# Altium PCB digital_power_board.PcbDoc
Units mil, origin at the board's own origin, x right, y up, seen from the top; angles counter-clockwise.
Board outline 5050 x 5050 mil, 6 copper layers (Top Layer, AGND, 3V3P, P5V, VBATT, Bottom Layer), stack 32.112 mil thick; 28 components, 23 nets, 139 pads, 108 vias.
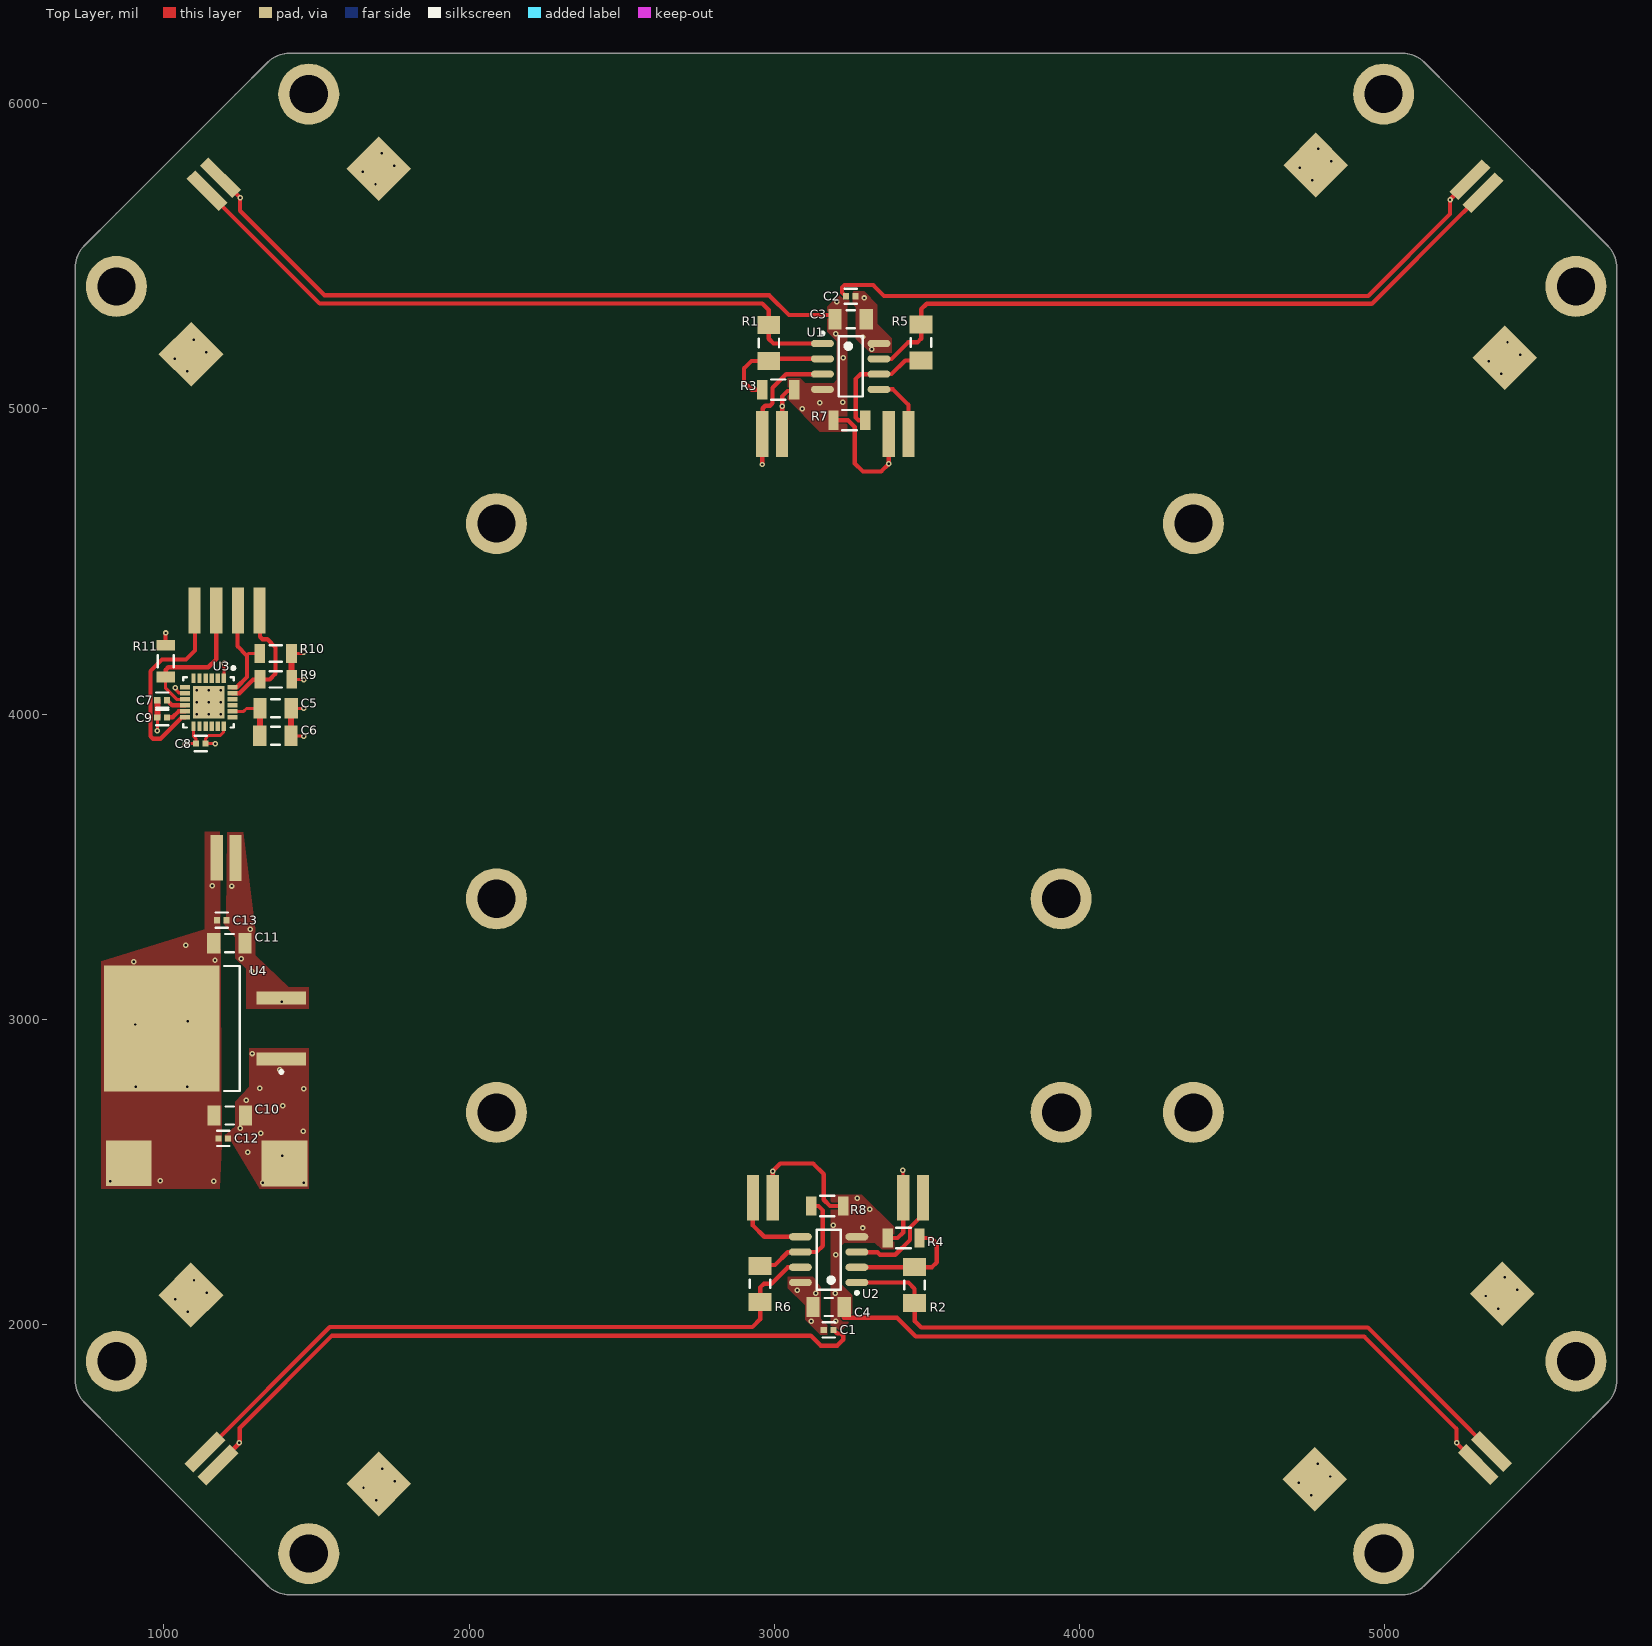
[diagram p0: Top Layer view]
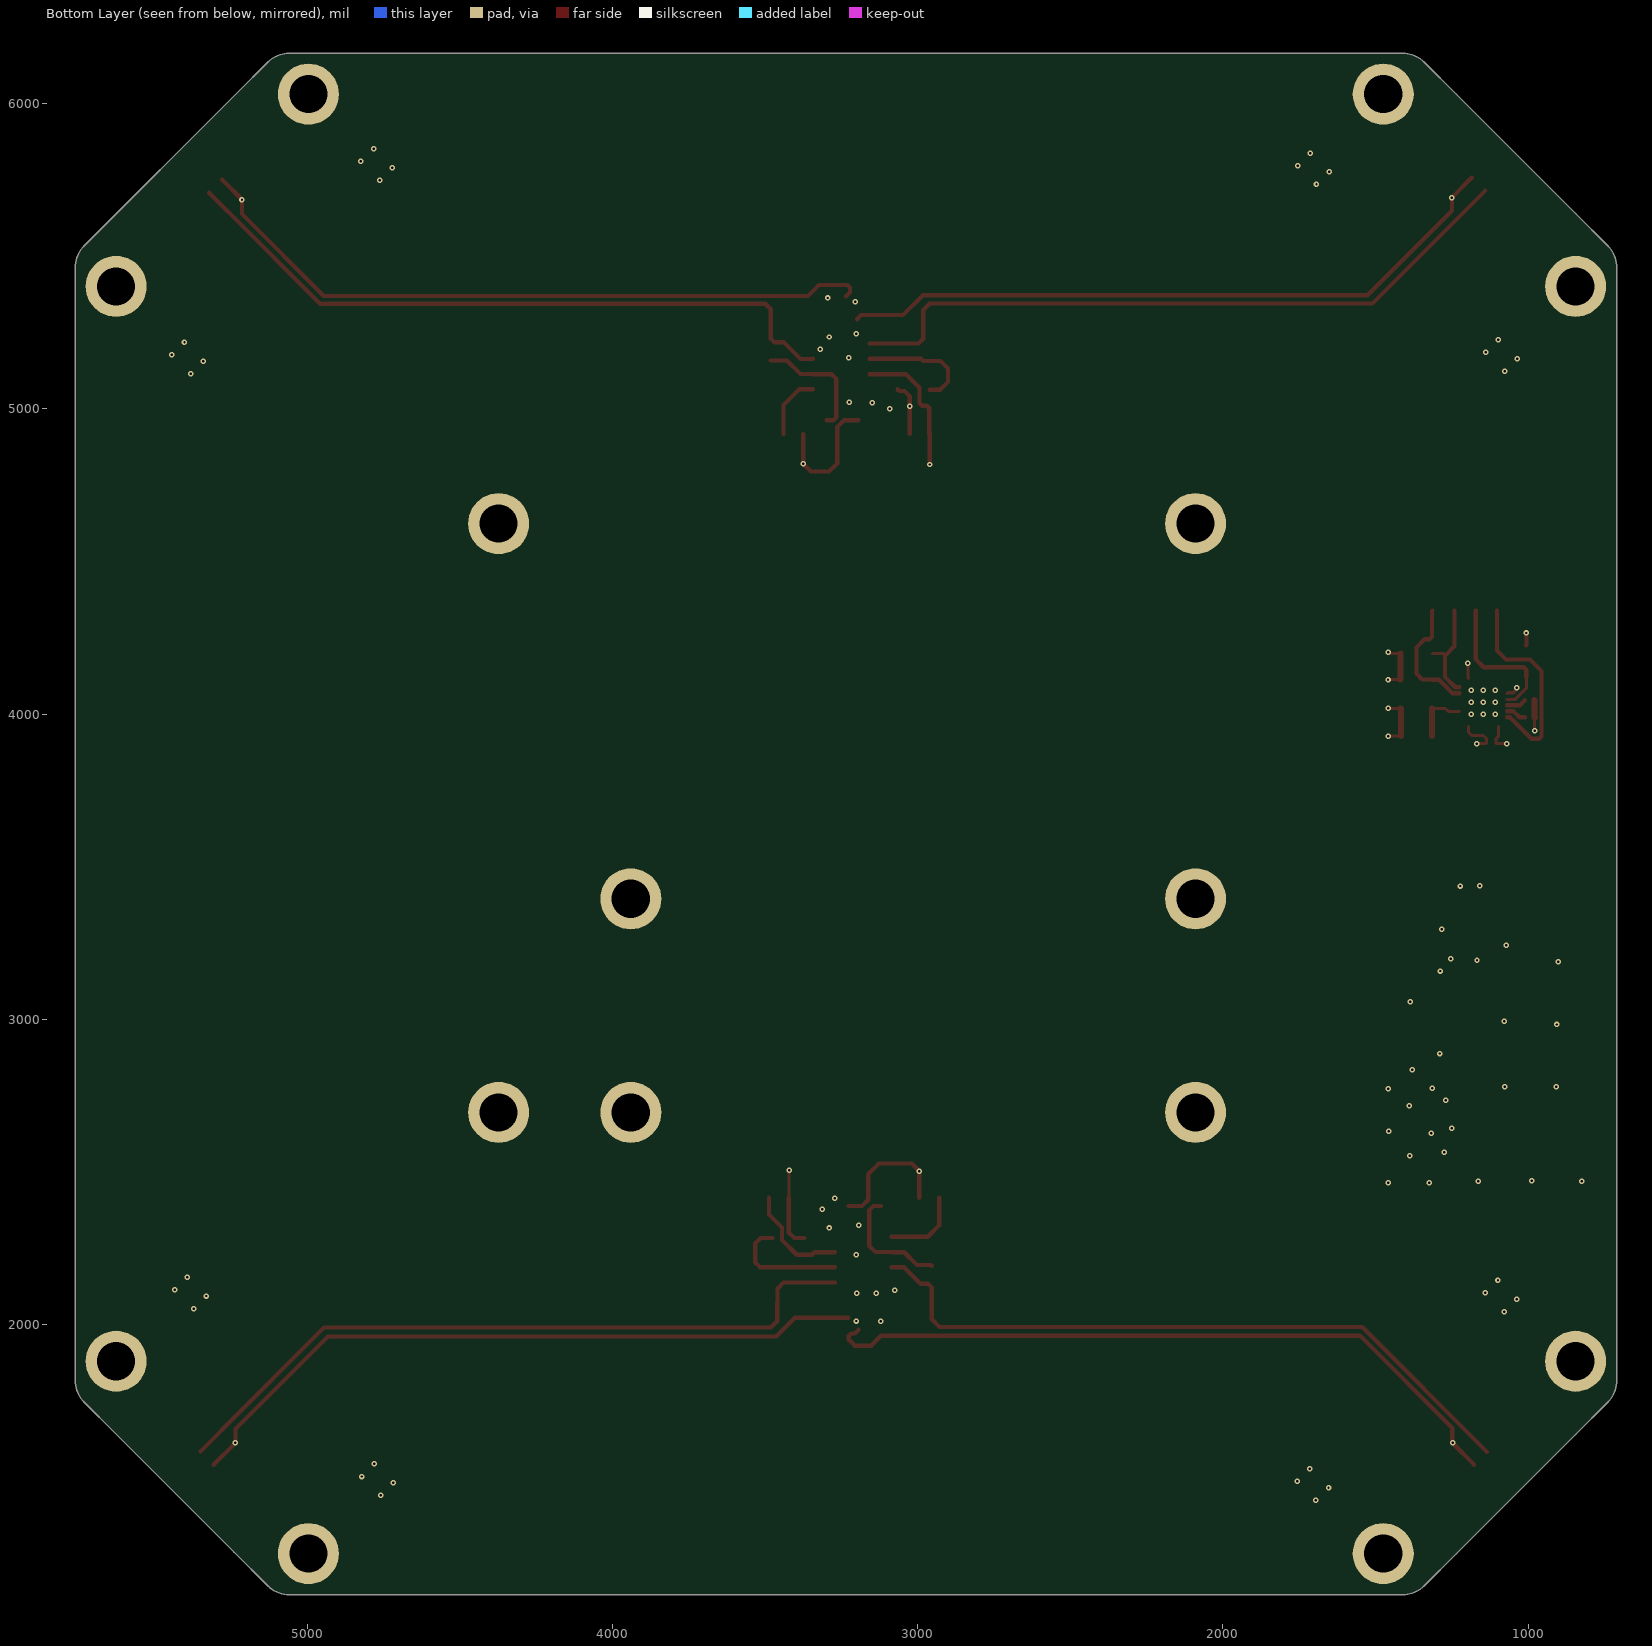
[diagram p1: Bottom Layer view, seen from below]
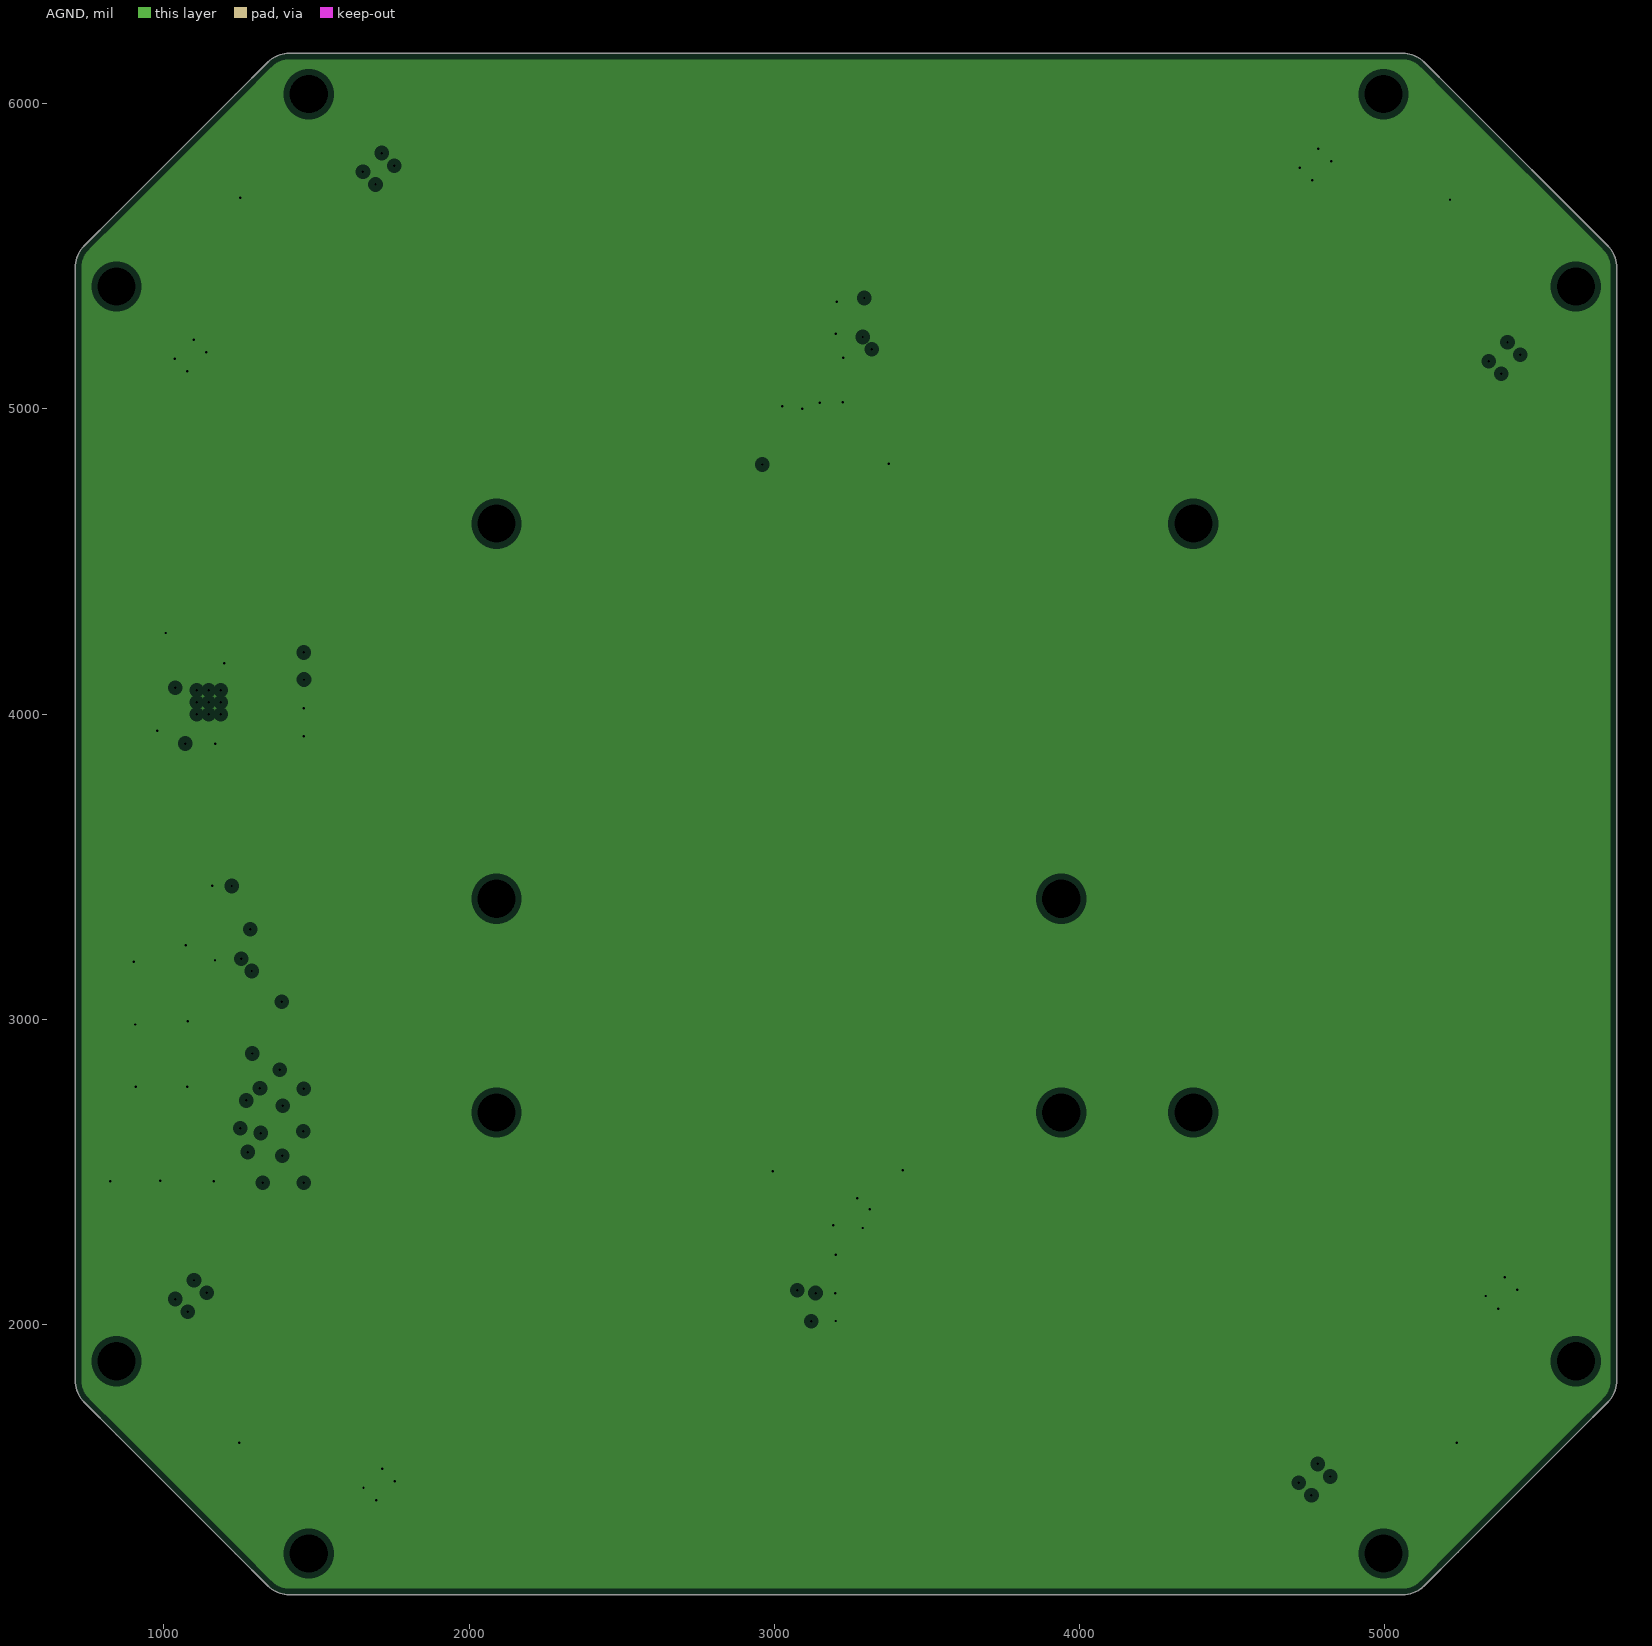
[diagram p2: AGND, clearances drawn from the general rule]
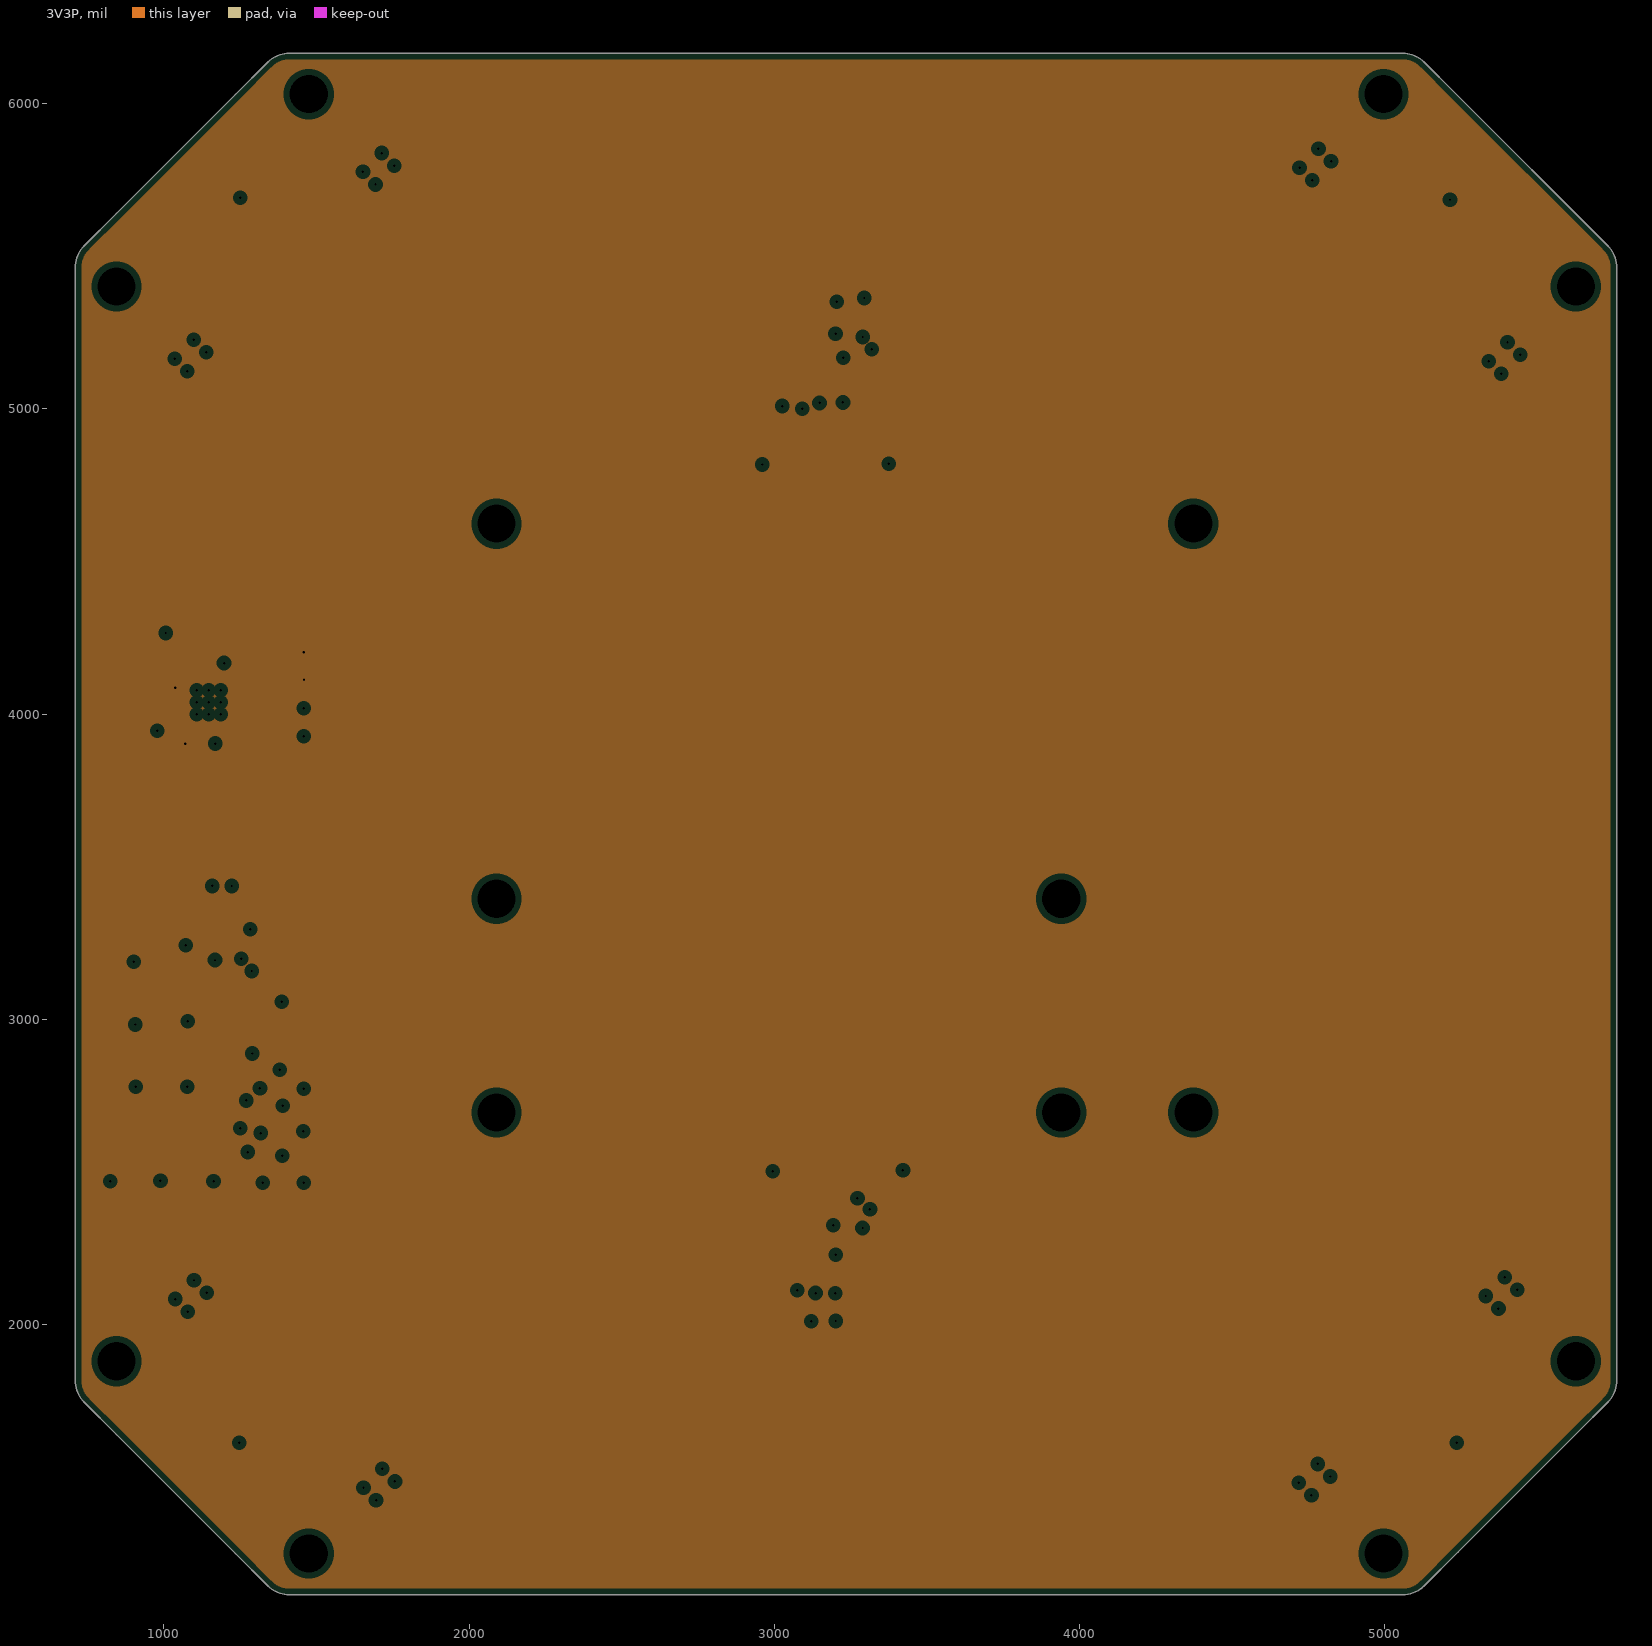
[diagram p3: 3V3P, clearances drawn from the general rule]
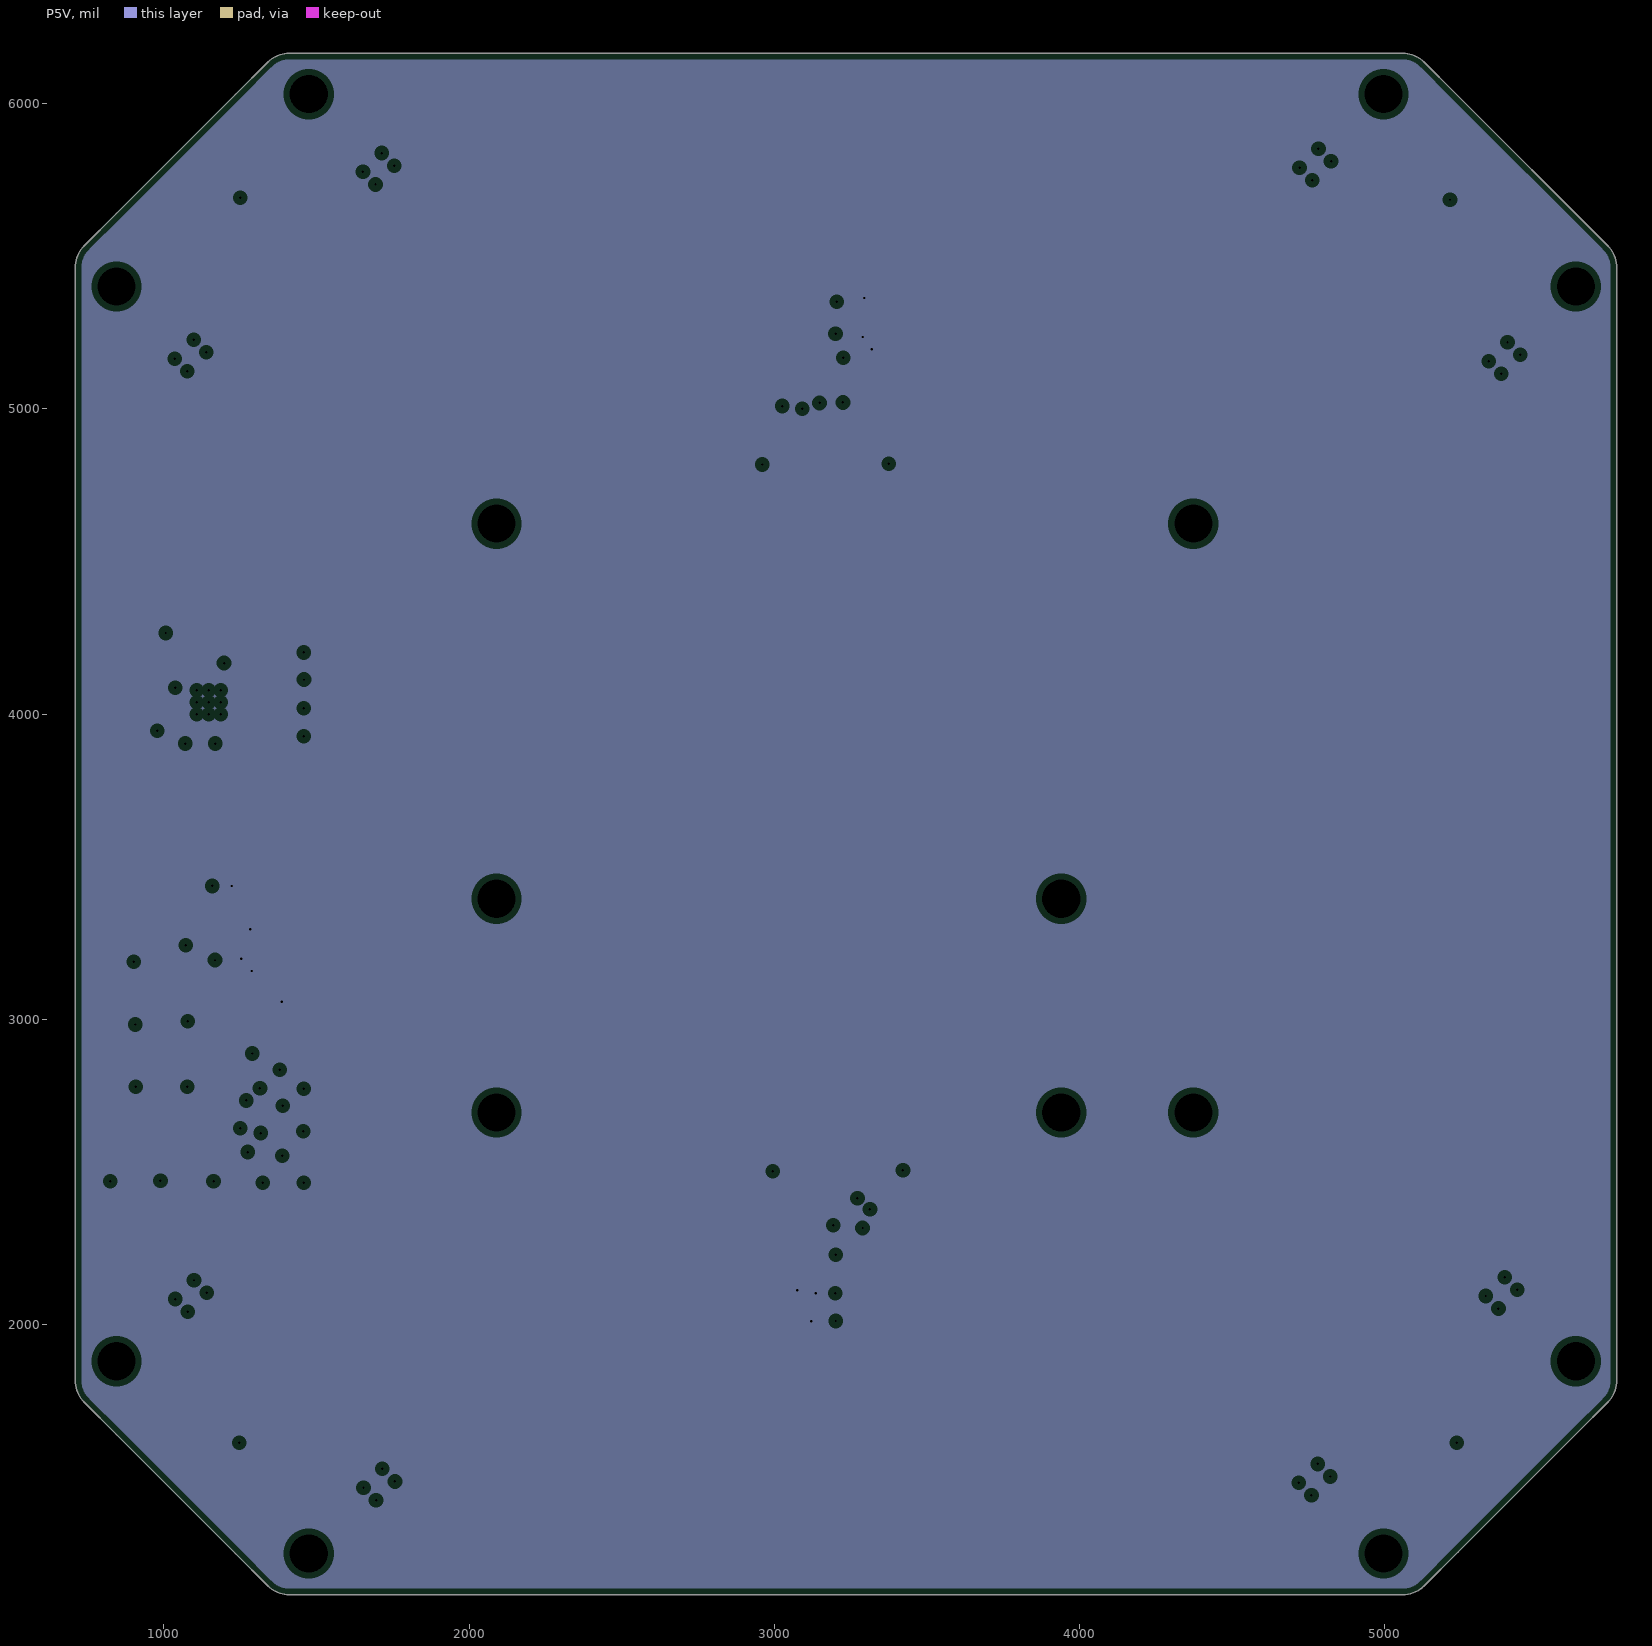
[diagram p4: P5V, clearances drawn from the general rule]
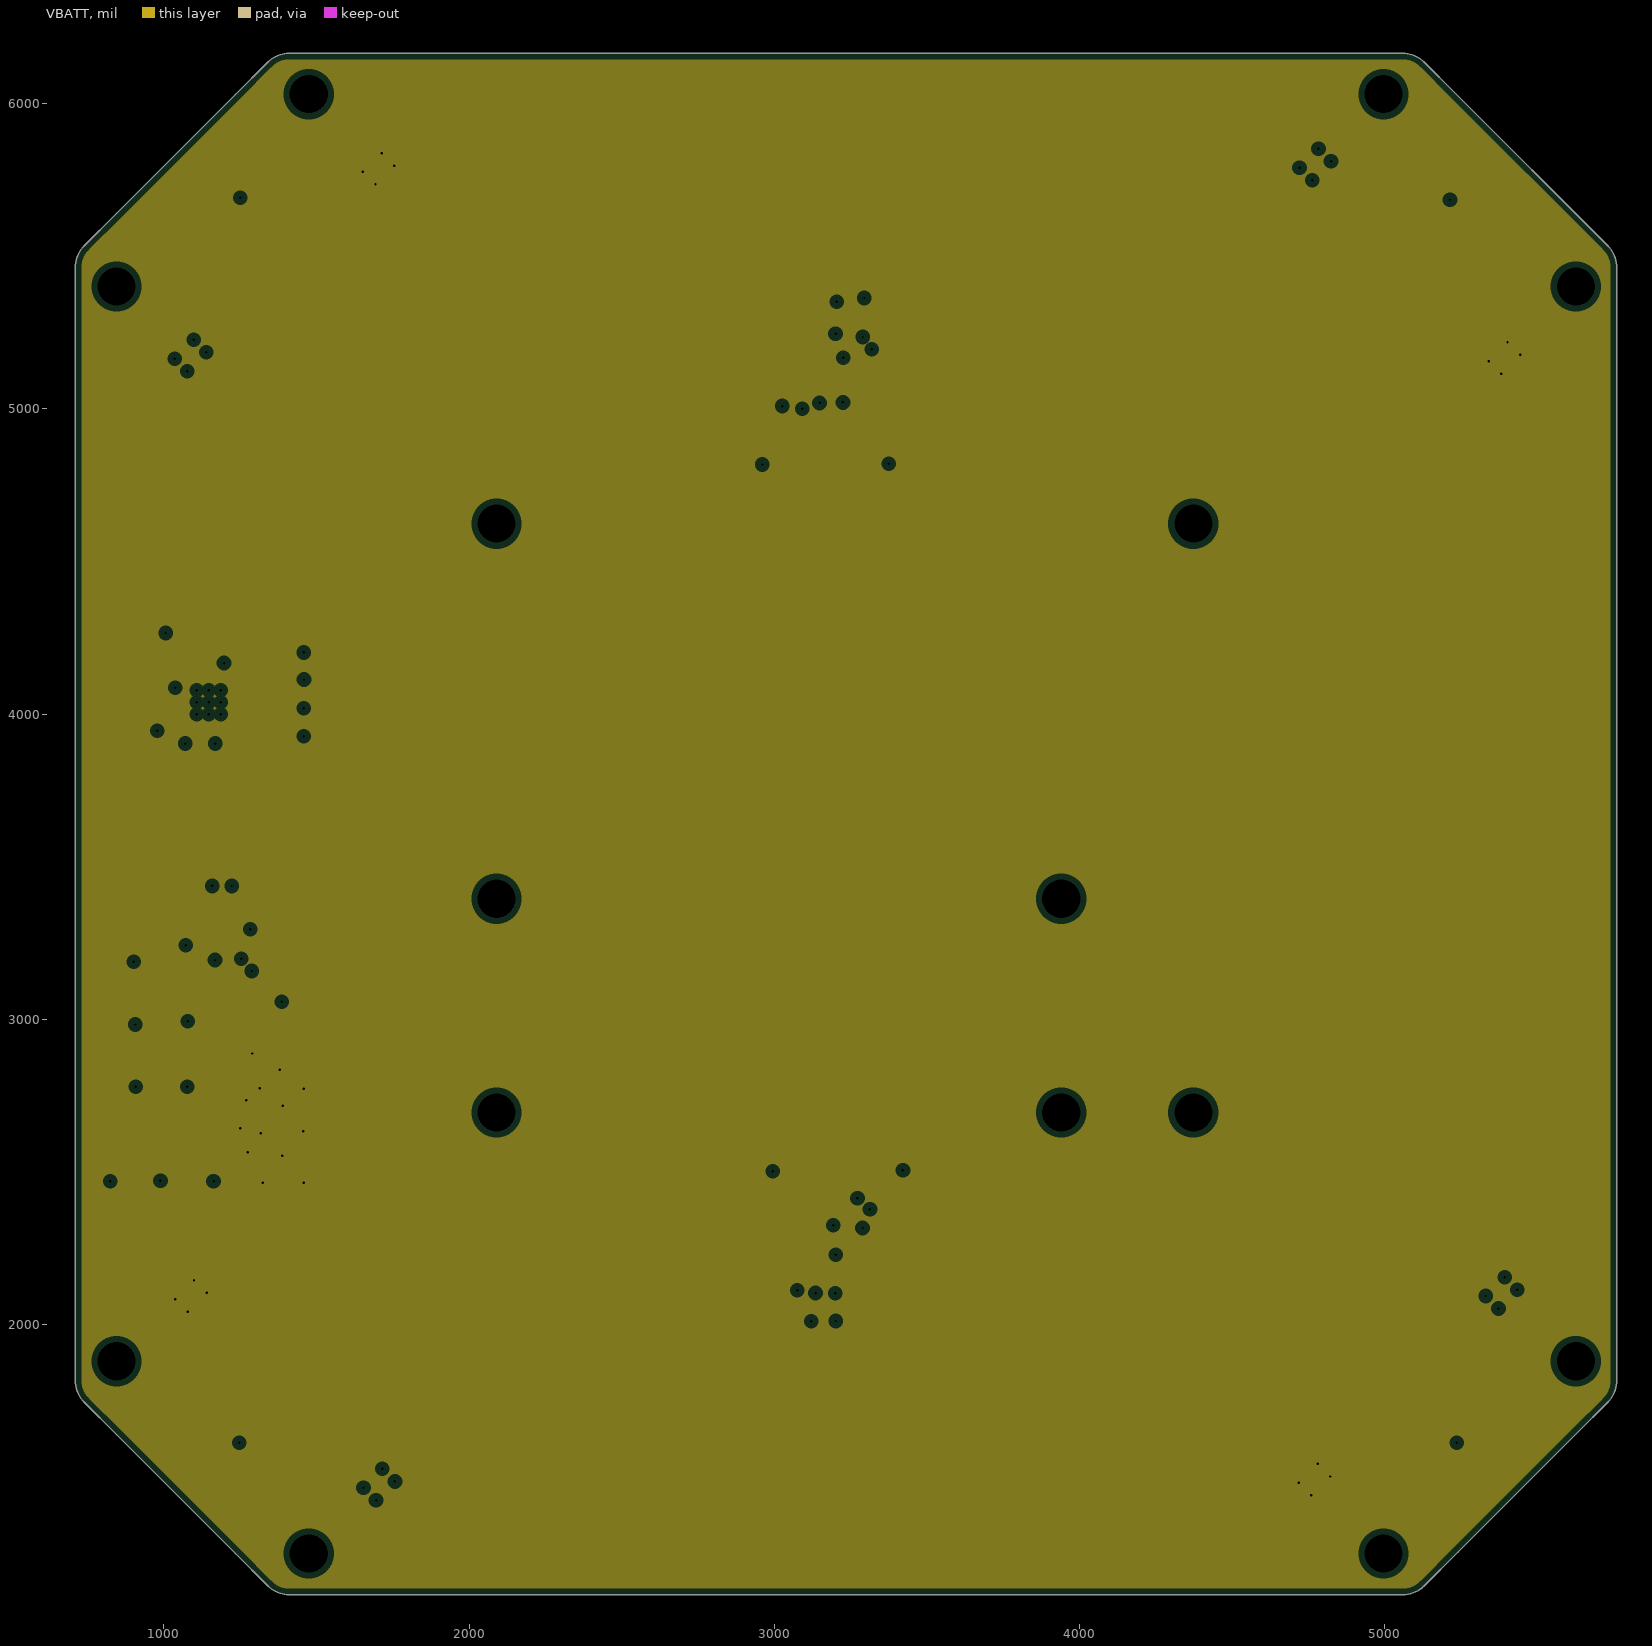
[diagram p5: VBATT, clearances drawn from the general rule]

## Layer stack, top to bottom
Top Solder: solder mask 0.4, Solder Resist, Dk 3.5
Top Layer: signal copper 1.4
Dielectric 2: prepreg 2.8, PP-006, Dk 4.1
AGND: plane copper 1.378, net AGND
Dielectric 4: prepreg 2.8, PP-006, Dk 4.1
3V3P: plane copper 1.378, net 3V3P
Dielectric 1: dielectric 12.6, FR-4, Dk 4.8
P5V: plane copper 1.378, net P5V
Dielectric 5: prepreg 2.8, PP-006, Dk 4.1
VBATT: plane copper 1.378, net VBATT
Dielectric 3: prepreg 2.8, PP-006, Dk 4.1
Bottom Layer: signal copper 1.4
Bottom Solder: solder mask 0.4, Solder Resist, Dk 3.5

## Board outline
5760,1880 5760,1816.42 cw(c5660,1816.42) 5730.71,1745.71 5630,1645 5240,1255 5129.29,1144.29 cw(c5058.58,1215) 5058.58,1115 4995,1115 1475,1115 1411.42,1115 cw(c1411.42,1215) 1340.71,1144.29 1235,1250 845,1640 739.29,1745.71 cw(c810,1816.42) 710,1816.42 710,1880 710,5400 710,5463.58 cw(c810,5463.58) 739.29,5534.29 845,5640 1235,6030 1340.71,6135.71 cw(c1411.42,6065) 1411.42,6165 1475,6165 4995,6165 5058.58,6165 cw(c5058.58,6065) 5129.29,6135.71 5230,6035 5730.71,5534.29 cw(c5660,5463.58) 5760,5463.58 5760,5400

## Design rules (kind name [scope] priority, off if disabled: settings)
Clearance [All] p1: gap=5 ignorepadtopadclearanceinfootprint=TRUE except(0: Arc-Hole Track-Hole SMDPad-Hole THPad-Hole Via-Hole Fill-Hole Poly-Hole Region-Hole Text-Hole)
HoleSize [All] p1: absolutevalues=TRUE maxlimit=150 minlimit=1 maxpercent=80.000 minpercent=20.000
PlaneClearance [All] p1: clearance=20
PlaneConnect [All] p1: planeconnectstyle=Relief reliefexpansion=20 reliefentries=4 reliefconductorwidth=10 reliefairgap=10
PolygonConnect [All] p1: connectstyle=Direct reliefconductorwidth=10 reliefentries=4 polygonreliefangle="90 Angle" airgapwidth=10
RoomDefinition Voltage_Regulator_5V [InComponentClass('Voltage_Regulator_5V')] p1: confinementstyle=ConfineIn formatcopy=TRUE lockcomponents=FALSE outline 5965.84,6293.21 272.6,6293.21 272.6,956.42 5965.84,956.42
RoomDefinition PWM_Signal_Amplifiers [InComponentClass('PWM_Signal_Amplifiers')] p2: confinementstyle=ConfineIn formatcopy=TRUE lockcomponents=FALSE outline 2780,1721.44 3579.62,1721.44 3579.62,5453.58 2780,5453.58
RoomDefinition MPU6050_Gyro_Accel_Temp [InComponentClass('MPU6050_Gyro_Accel_Temp')] p3: confinementstyle=ConfineIn formatcopy=TRUE lockcomponents=FALSE outline 1602.71,4443.56 871.72,4443.56 871.72,3845.47 1602.71,3845.47
RoutingCorners [All] p1: cornerstyle=45-Degree minsetback=10 maxsetback=10
RoutingVias [All] p1: holewidth=10 width=12 viastyle="Through Hole" minholewidth=5 minwidth=7 maxholewidth=95 maxwidth=100
SolderMaskExpansion [All] p1: expansion=4 istentingtop=FALSE
Width [All] p1: maxlimit=20 minlimit=10 preferedwidth=10
26 further rules are at their usual default settings.

## Classes and differential pairs
component class Voltage_Regulator_5V: C10 C11 C12 C13
component class PWM_Signal_Amplifiers: C1 C2 C3 C4 R1 R2 R3 R4 R5 R6 R7 R8 U1 U2
component class MPU6050_Gyro_Accel_Temp: C5 C6 C7 C8 C9 R9 R10 R11 U3

## Components (designator, comment, footprint, x,y, rotation, side; value= is the part's Value field where it differs from the comment)
C1 "0.1u" FP-C0402-BB-MFG 3178.23,1982.78 r0 top value="0.10 μF"
C2 "0.1u" FP-C0402-BB-MFG 3250.42,5368.77 r180 top value="0.10 μF"
C3 "1u" CAPC3216X110X50LL20T25 3250.42,5293.77 r0 top
C4 "1u" CAPC3216X110X50LL20T25 3178.23,2057.78 r180 top
C5 "1u" CAPC3216X110X50LL20T25 1366.36,4018.66 r180 top
C6 "1u" CAPC3216X110X50LL20T25 1365.93,3928.66 r180 top
C7 "0.1u" FP-C0402-BB-MFG 994.85,4045.68 r180 top value="0.10 μF"
C8 "0.1u" FP-C0402-BB-MFG 1121.36,3903.66 r0 top value="0.10 μF"
C9 "0.1u" FP-C0402-BB-MFG 994.59,3988.89 r180 top value="0.10 μF"
C10 "1u" CAPC3216X110X50LL20T25 1216.18,2685 r0 top
C11 "1u" CAPC3216X110X50LL20T25 1215,3250 r0 top
C12 "0.1u" FP-C0402-BB-MFG 1195,2610 r180 top value="0.10 μF"
C13 "0.1u" FP-C0402-BB-MFG 1190,3325 r180 top value="0.10 μF"
R1 "ERA8AEB302V" RESC3216X70X50ML20T25 2982.03,5216.08 r90 top
R2 "ERA8AEB302V" RESC3216X70X50ML20T25 3459.7,2129.3 r270 top
R3 "RQ73C2B6K04BTD 6.04k  ohm" FP-RQ732B-IPC_C 3012.98,5062.73 r180 top value=6.04KΩ
R4 "RQ73C2B6K04BTD 6.04k  ohm" FP-RQ732B-IPC_C 3423.66,2283.73 r0 top value=6.04KΩ
R5 "ERA8AEB302V" RESC3216X70X50ML20T25 3481.17,5217.82 r90 top
R6 "ERA8AEB302V" RESC3216X70X50ML20T25 2953.66,2133.73 r270 top
R7 "RQ73C2B6K04BTD 6.04k  ohm" FP-RQ732B-IPC_C 3246.17,4962.82 r0 top value=6.04KΩ
R8 "RQ73C2B6K04BTD 6.04k  ohm" FP-RQ732B-IPC_C 3173.66,2388.73 r180 top value=6.04KΩ
R9 "4.7K" RESC3216X70X50LL05T20 1367.11,4113.66 r180 top
R10 "4.7K" RESC3216X70X50LL05T20 1366.36,4198.66 r180 top
R11 "4.7K" RESC3216X70X50LL05T20 1006.36,4173.66 r270 top
U1 "OP284ESZ" ADI-R-8_L 3250.42,5138.77 r0 top
U2 "OP284ESZ" ADI-R-8_L 3178.23,2212.78 r180 top
U3 "MPU6050" INSE-QFN-24_V 1147.11,4038.66 r270 top
U4 "L4940D2T5-TR" TO-263_M 1135,2970 r180 top

## Footprints (in the part's own frame and the unit in brackets; to place one, negate y for a bottom-side part, rotate by r counter-clockwise, add the part's x,y. Pads: shape width x height; smd on the part's side, far side on the other; paste and mask are expansions set on the pad)
ADI-R-8_L [mm] "SOIC, 8-Leads, Body 4.9x3.9mm, Pitch 1.27mm, IPC High Density"
  oval 1.9x0.6 smd: 1(-2.35,1.905) 2(-2.35,0.635) 3(-2.35,-0.635) 4(-2.35,-1.905) 5(2.35,-1.905) 6(2.35,-0.635) 7(2.35,0.635) 8(2.35,1.905)
  silkscreen extent -2.47,-2.5 1,2.88, body extent -2,-2.5 2,2.5, height 1.75
CAPC3216X110X50LL20T25 [mm] "Chip Capacitor, 2-Leads, Body 3.20x1.60mm, IPC High Density"
  rect 1.1x1.7 smd: 1(-1.3,0) 2(1.3,0)
  silkscreen extent -0.35,-0.75 0.35,0.75, body extent -1.7,-0.9 1.7,0.9, height 1.1
FP-C0402-BB-MFG [mm]
  rect 0.52x0.52 smd paste+0 mask+0: 1(-0.4,0) 2(0.4,0)
  silkscreen extent -0.5,-0.64 0.5,0.63, body extent -0.8,-0.4 0.8,0.4, height 0.25
FP-RQ732B-IPC_C [mil]
  rect 33.79x63.47 smd paste+0 mask+0: 1(-52.24,0) 2(52.24,0)
  silkscreen extent -24,-33 24,33, body extent -73,-37 73,37, height 10
INSE-QFN-24_V [mm] "QFN, 24-Leads, Body 4.00x4.00mm, Pitch 0.50mm, Thermal Pad 2.7x2.6mm"
  rect 0.8x0.35 smd: 1(-2,1.25) 2(-2,0.75) 3(-2,0.25) 4(-2,-0.25) 5(-2,-0.75) 6(-2,-1.25) 13(2,-1.25) 14(2,-0.75) 15(2,-0.25) 16(2,0.25) 17(2,0.75) 18(2,1.25)
  rect 0.35x0.85 smd: 7(-1.25,-1.975) 8(-0.75,-1.975) 9(-0.25,-1.975) 10(0.25,-1.975) 11(0.75,-1.975) 12(1.25,-1.975) 19(1.25,1.975) 20(0.75,1.975) 21(0.25,1.975) 22(-0.25,1.975) 23(-0.75,1.975) 24(-1.25,1.975)
  rect 2.7x2.6 smd: 25(0,0)
  silkscreen extent -2.97,-2.1 2.1,2.18, body extent -2,-2 2,2, height 0.95
RESC3216X70X50LL05T20 [mm] "Chip Resistor, 2-Leads, Body 3.20x1.60mm, IPC High Density"
  rect 0.9x1.55 smd: 1(-1.325,0) 2(1.325,0)
  silkscreen extent -0.5,-0.67 0.5,0.67, body extent -1.63,-0.82 1.62,0.82, height 0.7
RESC3216X70X50ML20T25 [mm] "Chip Resistor, 2-Leads, Body 3.20x1.60mm, IPC Low Density"
  rect 1.5x1.9 smd: 1(-1.5,0) 2(1.5,0)
  silkscreen extent -0.35,-0.85 0.35,0.85, body extent -1.7,-0.9 1.7,0.9, height 0.7
TO-263_M [mm] "D2-PAK, 4-Leads, Body 9.2x10.2mm, Pitch 2.54mm, Lead Span 15.4mm, IPC Low Density"
  rect 4.1x1.05 smd: 1(-6.35,2.54) 3(-6.35,-2.54)
  rect 9.6x10.45 smd: 4(3.6,0)
  silkscreen extent -6.48,-5.2 -1.6,5.2, body extent -2.9,-5.2 6.45,5.2, height 4.6

## Part data
C1 C2 C7 C8 C9 C12 C13: library part CMP-2008-02046-2, "CAP CER 0.1UF 10V X5R 0402", Capacitance="0.10 μF", Manufacturer=Kemet, Manufacturer Part Number=C0402C104K8PACTU, Package=C0402-BB, Temperature="-55°C to +125°C", Temperature Characteristic=X5R, Temperature Coefficient=15%, Temperature Range High=+125°C, Temperature Range Low=-55°C, Tolerance=0.1, Voltage Rating="10 V", Automotive=No, CATEGORY=Cap, ComponentLink2Description=Datasheet, ComponentLink2URL=https://content.kemet.com/datasheets/KEM_C1002_X7R_SMD.pdf, Device Class L1="Passive Components", Device Class L2=Capacitors, Device Class L3="Ceramic Capacitors", Digikey Description="CAP CER 0.1UF 10V X5R 0402", Height=0.55mm, Ipc Land Pattern Name=CAPC10050X50, Lead Free=Yes, Material=Ceramic, Mouser Description="Capacitor 100 nF 10 VDC 0402", Octopart=https://octopart.com/c0402c104k8pactu-kemet-140039, RoHS=TRUE
C3 C4 C5 C6 C10 C11: library part CMP-2000-06011-1, "Chip Capacitor, 1 uF, +/- 10%, 50 V, -55 to 125 degC, 1206 (3216 Metric), RoHS, Tape and Reel", Capacitance=1uF, Capacitance - nF=1000nF, Case Code - in=1206, Case Code - mm=3216, Case Height=1mm, Case Length=3.2mm, Case Width=1.6mm, Dielectric=X7R, Manufacturer=Kemet, Maximum Operating Temperature=+125C, Minimum Operating Temperature=-55C, Operating Temperature Range=-55Cto+125C, Package / Case=1206(3216metric), Package Description="2-Pin Surface Mount Device, Body 3.2 x 1.6 mm", Temperature Coefficient / Code=+/-15%, Tolerance=10%, Voltage Rating=50V, Brand=Kemet, Class=Class1, Datasheet URL=http://www.kemet.com/docfinder?Partnumber=C1206C105K5RACTU, Datasheet Version=02/2016, Dimensions=1.6mmWx3.2mmLx1mmH, Factory Pack Quantity=2500, Manufacturer URL=http://www.kemet.com/, Mounting Technology=SurfaceMount, Package Reference=1206, Packaging=Reel, Product=GeneralTypeMLCCs, Product Category=MultilayerCeramicCapacitorsMLCC-SMD/SMT, RoHS=Details, Series=C1206C, Termination Style=SMD/SMT, Type=SMDMLCCX7R6.3-250VDCCommericalGrade, Voltage Rating DC=50V
R1 R2 R5 R6: library part CMP-2003-04451-1, Manufacturer=Panasonic, Part Number=ERA8AEB302V
R3 R4 R7 R8: library part CMP-03211-007803-1, "RQ732B 1206 6.04KΩ 0.4W 10ppm/°C 0.1% 200V", Manufacturer=TE, Manufacturer Part Number=RQ73C2B6K04BTD, Package=RQ732B, Power Rating=0.4W, Resistance=6.04KΩ, Temperature="-55°C to +155°C", Temperature Coefficient=10ppm/°C, Temperature Range High=+155°C, Temperature Range Low=-55°C, Tolerance=0.1%, Voltage Rating=200V, Automotive=Yes, Automotive Grade="Grade 0", CATEGORY=Res, ComponentLink2Description=Datasheet, ComponentLink2URL=https://www.te.com/commerce/DocumentDelivery/DDEController?Action=showdoc&DocId=Data+Sheet%7F1773270-2%7FA%7Fpdf%7FEnglish%7FENG_DS_1773270-2_A.pdf%7F9-2176388-439, Composition="Thin Film", Device Class L1="Passive Components", Device Class L2=Resistors, Device Class L3="Chip SMD Resistors", Height=0.75mm, Ipc Land Pattern Name=RESC310160X60, Lead Free=Yes, Octopart=https://octopart.com/rq73c2b6k04btd-te+connectivity-93912055, RoHS=TRUE, Series=RQ73
R9 R10 R11: library part CMP-2003-00848-1, Manufacturer=Panasonic, Part Number=ERJ8ENF4701V
U1 U2: library part CMP-0384-00701-1, "Double Channel Single-Supply Operation Operational Amplifier, 4.25 MHz BW, 4 V/us SR, Industrial, 8-pin SOIC (R-8), Tube", Amplifiers Per Package=2, Generic Part Number=OP284, Input Bias Current=80nA, Input Offset Voltage=175uV, Manufacturer="Analog Devices", Code_JEDEC=MS-012-AA, ComponentLink1Description="Manufacturer URL", ComponentLink1URL=http://www.analog.com/en/index.html, ComponentLink2Description=Datasheet, ComponentLink2URL=http://www.analog.com/static/imported-files/data_sheets/OP184_284_484.pdf, ComponentLink3Description="Package Specification", ComponentLink3URL=http://www.analog.com/static/imported-files/packages/PKG_PDF/SOIC_Narrow%20(R)/R_8.pdf, DatasheetVersion="Rev. J", Iq/Amp=2mA, Mounting Technology="Surface Mount", PackageDescription="8-Pin Standard Small Outline Package, Body 3.9 x 4.9 mm, Pitch 1.27 mm", PackageReference=R-8, PackageVersion=060506-A, PartNumber=OP284ESZ, Slew Rate=4V/us, Small Signal Bandwidth=4.25MHz, V Span Max=36V, V Span Min=3V
U3: library part CMP-1753-00002-1, "3-Axis Gyroscope, 3-Axis Accelerometer / , 2.375 to 3.46 V, -40 to 105 degC, 24-Pin QFN, RoHS, Tape and Reel", Case Code (Imperial)=0603, Case Code (Metric)=1608, Max Operating Temperature=155degC, Min Operating Temperature=-55degC, Package Quantity=5000, Power Rating="100 mW", Resistance="5.6 kohm", Tolerance=1%, Voltage Rating="75 V", Case/Package=0603, ComponentLink1Description="Manufacturer URL", ComponentLink1URL=http://www.invensense.com/, ComponentLink2Description=Datasheet, ComponentLink2URL=https://datasheet.ciiva.com/1513/1788002-1513632.pdf, DatasheetVersion="Rev. 3.4, 08/2013", Height="0.45 mm", Length="1.6 mm", Mount="Surface Mount", PackageDescription="24-Pin Quad Flat No-lead Package, Body 4 x 4 mm, Pitch 0.5 mm", PackageReference=QFN-24, Packaging="Tape and Reel", Pins=2, Radiation Hardening=No, REACH SVHC=Yes, RoHSCompliant=True, Width="0.8 mm"
U4: library part CMP-0244-00196-1, "1.5A Very Low Drop Regulator, 3-Pin D2PAK, Tape and Reel", ComponentLink1Description="Manufacturer URL", ComponentLink1URL=http://www.st.com, ComponentLink2Description=Datasheet, ComponentLink2URL=http://www.st.com/internet/com/TECHNICAL_RESOURCES/TECHNICAL_LITERATURE/DATASHEET/CD00000442.pdf, DatasheetVersion=16/12/2009, PackageDescription="3-Pin Transistor Outline Package 2.54 mm Pitch, 15.4 mm Lead Span (D2PAK)", PackageReference=TO-263, PackageVersion=2011

## Free pads (board coordinates)
  round 200 hole 125: 1(4996,1250) 2(5626,1880) 3(4996,6031) 4(5626,5401) 5(1475,6031) 6(845,5401) 7(1475,1250) 8(845,1880) 9(4373,2695) 10(2090,2695) 11(2090,4624) 12(4373,4624) 13(2090,3395) 14(3940,2695) 15(3940,3395)
  rect 40x150 smd: 16(2960.91,4917.55) 17(3025.75,4917.55) 18(3375.11,4917.55) 19(3439.95,4917.55) 28(2994.83,2415.95) 29(2929.95,2415.95) 30(1173.72,3529.15) 30(3487.34,2415.95) 31(1234.84,3528.54) 31(3422.5,2415.95) 34(1313.85,4339.52) 35(1242.92,4339.52) 36(1101.06,4339.52) 37(1171.99,4339.52)
  rect 150x40 smd rot 135: 20(1141.93,5714.18) 20(5306.07,1541.29) 21(1185.45,5757.29) 21(5349.59,1584.4)
  rect 150x40 smd rot 45: 22(1134.99,1583.08) 22(5278.96,5750.82) 23(1178,1540.07) 23(5321.97,5707.81)
  rect 150x150 smd: 33(1395.09,2527.79) 34(885.28,2528.89)
  rect 150x150 smd rot 45: 34(1089.19,2097) 34(1089.32,5178.33) 34(1704.36,1477.93) 34(1704.37,5785.88) 34(4770.42,1494.16) 34(4774.13,5798.83) 34(5385.47,2101.7) 34(5392.64,5167.43)

## Via types
v1: diameter 18, hole 8, Top Layer to Bottom Layer, tented both sides, 108 vias

## Nets (pads, with @x,y where several pads share a name; then routed paths per layer and width w, separated by ;. In a path a pad name is that pad's centre, name@x,y a point inside that pad or via, vN(x,y) a via of type N, cw(c..) or ccw(c..) an arc to the next point about the centre after c; other vN are vias at no path point)
3V3P: C8.1 R9.1 R10.1 U3.8 U3.13 | length 303.9
  Top Layer w10: v1(1037.43,4085.84) 1037.43,4083.68 1042.62,4078.49 1042.62,4076.84 1048.68,4070.78 1048.68,4070.05 1067.49,4070.05 U3.8 ; v1(1070.9,3903.49) 1070.99,3903.58 1105.53,3903.58 C8.1 1104.94,3904.33 1104.94,3919.41 1097.9,3926.45 U3.13 ; R10.1 1453.64,4198.66 1457.02,4202.03 v1(1459.18,4202.03) ; R9.1 1419.8,4113.13 v1(1459.43,4113.13)
  Top Layer w20: R10.1 1418.9,4198.29 1418.9,4114.03 R9.1
AGND: C1.2 C2.2 C3.1 C4.1 C5.1 C6.1 C7.2 C8.2 C9.2 C10.1 C11.1 C12.2 C13.2 pad.17 pad.18 pad.20@5306.07,1541.29 pad.21@1185.45,5757.29 pad.22@5278.96,5750.82 pad.23@1178,1540.07 pad.28 pad.30@1173.72,3529.15 pad.31@3422.5,2415.95 pad.34@885.28,2528.89 pad.34@1089.32,5178.33 pad.34@1704.36,1477.93 pad.34@4774.13,5798.83 pad.34@5385.47,2101.7 R3.1 R4.1 R7.1 R8.1 R11.1 U1.4 U2.4 U3.1 U3.18 U4.4 | length 10958.6
  Top Layer w10: C9.2 978.88,3988.86 v1@978.88,3945.66 ; v1(1168.55,3903.49) 1168.47,3903.58 1137.19,3903.58 C8.2 1136.45,3904.32 1136.45,3919.41 1146.86,3929.82 1185.45,3929.82 1195.87,3940.23 1195.87,3959.46 U3.18 ; U3.1 1196.94,4118.02 1196.94,4166.69 v1(1197.55,4167.31) ; C6.1 1418.06,3927.71 v1(1459.18,3927.71) ; C5.1 1417.79,4018.91 v1(1459.18,4018.91) ; v1(3421.49,2505.32) 3421.49,2416.64 pad.31@3422.34,2415.78 ; v1@978.88,3945.66 v1(978.91,3945.63)
  Top Layer w14: v1(1006.04,4265.72) 1006.04,4226.15 R11.1 ; pad.23@1178,1540.07 1178,1542.12 1248.85,1612.97 1248.85,1661.49 1551.25,1963.89 3119.66,1963.89 3152.38,1931.16 3206.55,1931.16 3226.13,1950.75 3226.13,1962.35 3217.93,1970.55 3206.2,1970.55 C1.2 ; pad.21@1185.45,5757.29 1185.45,5757.2 1250.07,5692.59 1250.07,5648.88 1526.94,5372 2983.28,5372 3048.03,5307.25 3185.75,5307.25 C3.1 ; pad.28 2994.83,2503.02 3019.76,2527.95 3127.27,2527.95 3162.33,2492.89 3162.33,2408.98 3182.59,2388.73 R8.1 ; pad.17 3025.75,5040.66 3043.32,5058.23 3060.72,5058.23 R3.1 R3.1@3066.26,5063.77 ; R7.1 3241.32,4962.82 3263.9,4940.25 3263.9,4821.24 3290.57,4794.56 3350.07,4794.56 3375.21,4819.7 3375.21,4827.39 3375.11,4827.49 pad.18 ; 3228.05,2022.35 3401.96,2022.35 3463.25,1961.05 4932.46,1961.05 5235.08,1658.43 5235.08,1612.28 pad.20@5306.07,1541.29 ; C2.2 3222.04,5381.4 3222.04,5397.66 3230.24,5405.86 3323.82,5405.86 3359.85,5369.83 4945.88,5369.83 5214.01,5637.96 5214.01,5686.39 5214.27,5686.39 5278.7,5750.82 pad.22@5278.96,5750.82 ; R4.1 3403.97,2283.73 3422.34,2302.09 pad.31@3422.34,2415.78
  Top Layer w20: C9.2 979.1,3989.15 C7.2 ; C6.1 1417.32,3928.88 1417.32,4018.44 C5.1
  other v1: 1695.54,1424.54 1654.29,1465.67 1757.41,1486.24 1716.16,1527.37 1247.29,1612.75 5235.41,1612.78 3201.68,2011.81 5372.41,2052.6 5331.16,2093.73 3200.03,2102.3 5434.28,2114.3 5393.03,2155.43 3201.68,2228.73 3289.2,2316.53 3193.44,2325.28 3313.47,2377.66 3272.55,2414.21 825.29,2469.81 1163.15,2470.07 989.2,2471.65 2994.86,2502.59 908.55,2779.35 1076.96,2779.35 906.97,2983.21 1078.55,2994.28 901.44,3188.8 1167.89,3194.32 1072.22,3243.34 1158.4,3437.05 3374.72,4820.14 3091.57,5000.28 3025.95,5009.17 3148.3,5019.33 3224.93,5021.03 1077.13,5123.43 1035.88,5164.56 3226.34,5167.61 1139,5185.13 1097.75,5226.26 3200.82,5245.87 3205.22,5351.36 5213.69,5684.52 1250.88,5691.05 4762.12,5748.89 4720.87,5790.02 4824,5810.59 4782.75,5851.72
NetC5_2: C5.2 C6.2 U3.20 | length 189.2
  Top Layer w10: U3.20 1261.83,4009.13 1271.36,4018.66 C5.2 ; C6.2@1311.36,3932.05 C6.2
  Top Layer w20: C6.2 1314.96,3928.88 1314.96,4018.44 C5.2
NetC7_1: C7.1 U3.10 | length 66
  Top Layer w10: U3.10@1069.19,4028.66 U3.10
  Top Layer w14: C7.1 1027.46,4028.82 U3.10
NetC9_1: C9.1 U3.11 | length 67.9
  Top Layer w10: U3.11@1068.98,4009.51 U3.11
  Top Layer w14: C9.1 1011.33,3989.88 1029.19,3989.88 1048.33,4009.02 1069.24,4009.02 U3.11
NetR1_1: R1.1 R3.2 U1.2 | length 384.7
  Top Layer w14: R3.2 2926.54,5062.73 2900.84,5088.44 2900.84,5132.58 2925.28,5157.02 R1.1 2988.77,5163.77 U1.2
NetR1_2: pad.20@1141.93,5714.18 R1.2 U1.1 | length 2279
  Top Layer w14: pad.20@1141.93,5713.85 1141.93,5714.18 1510.75,5345.37 2960.63,5345.37 2982.03,5323.97 R1.2 2982.03,5229.44 2997.7,5213.77 U1.1
NetR2_1: R2.1 R4.2 U2.2 | length 394.2
  Top Layer w14: U2.2 3459.13,2187.78 R2.1 3516.73,2188.35 3532.64,2204.27 3532.64,2265.45 3514.37,2283.73 R4.2
NetR2_2: pad.21@5349.59,1584.4 R2.2 U2.1 | length 2370.3
  Top Layer w14: U2.1 3439.45,2137.78 3459.7,2117.53 R2.2 3460.65,2069.29 3460.65,2011.11 3481.48,1990.28 4944.56,1990.28 5282.7,1652.14 5282.7,1651.28 pad.21@5349.59,1584.4
NetR5_1: R5.1 R7.2 U1.6 | length 401.7
  Top Layer w14: R7.2 3297.98,4962.39 3275.91,4962.39 3266.61,4971.69 3266.61,5097.63 3282.52,5113.53 3342.71,5113.53 U1.6 3343.24,5114.07 3384.28,5114.07 3428.98,5158.77 R5.1
NetR5_2: pad.23@5321.97,5707.81 R5.2 U1.7 | length 2260.9
  Top Layer w14: U1.7 3343.19,5163.51 3384.28,5163.51 3438.59,5217.82 3468.96,5217.82 3481.17,5230.03 R5.2 3481.17,5326.19 3499.46,5344.48 4957.72,5344.48 5256.62,5643.38 5257.08,5643.38 5321.51,5707.81 pad.23@5321.97,5707.81
NetR6_1: R6.1 R8.2 U2.6 | length 392.2
  Top Layer w14: R6.1 2956.43,2195.55 3002.62,2195.55 3044.37,2237.3 3085.22,2237.3 U2.6 3138.49,2237.78 3159.25,2258.54 3159.25,2373.96 3144.66,2388.55 3121.59,2388.55 R8.2
NetR6_2: pad.22@1134.99,1583.08 R6.2 U2.7 | length 2262.2
  Top Layer w14: pad.22@1134.99,1583.08 1543.79,1991.88 2928.23,1991.88 2953.73,2017.38 2953.73,2074.6 R6.2 2953.66,2121.36 2966.03,2133.73 2990.44,2133.73 3044.37,2187.65 3085.58,2187.65 U2.7
NetR9_2: pad.34@1313.85,4339.52 R9.2 U3.23 | length 406
  Top Layer w14: U3.23 1224.97,4068.3 1247.9,4068.3 1292.3,4112.7 1313.98,4112.7 R9.2 1347.42,4113.66 1366.36,4132.6 1366.36,4218.35 1339.42,4245.29 1323.74,4245.29 1315.67,4253.36 1315.67,4337.7 pad.34@1313.85,4339.52
NetR10_2: pad.35 R10.2 U3.24 | length 338.2
  Top Layer w10: 1271.36,4192.52 1277.22,4198.38 1313.91,4198.38 R10.2
  Top Layer w14: U3.24 1224.97,4087.98 1238.93,4087.98 1272.63,4121.68 1272.63,4191.25 1271.36,4192.52 1241.3,4222.58 1241.3,4246.14 1241.83,4246.67 pad.35@1241.83,4339.52
NetR11_2: pad.37 R11.2 U3.9 | length 478.4
  Top Layer w10: R11.2 1006.36,4084.79 1042.35,4048.8 1042.35,4048.5 U3.9
  Top Layer w14: R11.2 1006.36,4144.99 1014.97,4153.6 1145.6,4153.6 1172.42,4180.42 1172.42,4339.09 pad.37
NetU1_3: pad.16 U1.3 | length 456.5
  Top Layer w14: v1(2961.07,4817.69) 2960.99,4817.77 2960.99,4917.47 pad.16 2962.41,4919.05 2962.41,5002.2 2970.61,5010.4 2986.32,5010.4 2994.52,5018.6 2994.52,5069.14 3039.14,5113.77 U1.3
NetU1_5: pad.19 U1.5 | length 213.6
  Top Layer w14: U1.5 3343.06,5063.89 3389.11,5063.89 3439.95,5013.04 pad.19
NetU2_3: pad.30@3487.34,2415.95 U2.3 | length 353.9
  Top Layer w14: U2.3 3271.3,2237.23 3338.41,2237.23 3346.58,2229.06 3396.24,2229.06 3444.81,2277.63 3444.81,2318.41 3487.34,2360.95 3487.34,2415.95 pad.30@3487.25,2416.04
NetU2_5: pad.29 U2.5 | length 262.1
  Top Layer w14: pad.29 2929.95,2325.02 2967.2,2287.78 U2.5
NetU3_12: pad.36 U3.12 | length 663.6
  Top Layer w14: U3.12 1059.73,3989.45 989.68,3919.4 964.53,3919.4 956.33,3927.6 956.33,4140.77 994.47,4178.91 1072.72,4178.91 1102.08,4208.26 pad.36@1102.08,4339.52
P5V: C1.1 C2.1 C3.2 C4.2 C11.2 C13.1 pad.31@1234.84,3528.54 U1.8 U2.8 U4.3
  other v1: 3121.58,2011.1 3135.22,2103.4 3075.81,2112.35 1386.18,3057.79 1288.25,3158.39 1253.61,3199.03 1283.59,3295.63 1222.96,3436.87 3318.86,5195.5 3289.79,5235.38 3294.28,5363.16
VBATT: C10.2 C12.1 pad.33 pad.34@1089.19,2097 pad.34@1704.37,5785.88 pad.34@4770.42,1494.16 pad.34@5392.64,5167.43 U4.1
  other v1: 4759.84,1440.67 4718.59,1481.81 4821.71,1502.37 4780.46,1543.5 1078.51,2042.6 1037.26,2083.73 1140.39,2104.3 1099.14,2145.43 1324.05,2464.98 1459.15,2464.98 1387.96,2553.16 1274.7,2565.3 1317.58,2627.59 1457.53,2633.25 1250.43,2642.96 1390.39,2717.38 1269.85,2734.37 1458.34,2773.2 1315.15,2774.01 1379.87,2835.5 1290.07,2888.08 5381.48,5115.08 5340.23,5156.21 5443.35,5176.78 5402.1,5217.91 1693.74,5735.13 1652.49,5776.27 1755.62,5796.83 1714.37,5837.97
pads on no net: U3.2 U3.3 U3.4 U3.5 U3.6 U3.7 U3.14 U3.15 U3.16 U3.17 U3.19 U3.21 U3.22 U3.25
copper on no net:
  other v1: 1107.74,3999.29 1147.11,3999.29 1186.48,3999.29 1107.74,4038.66 1147.11,4038.66 1186.48,4038.66 1107.74,4078.03 1147.11,4078.03 1186.48,4078.03

## Polygon pours and split planes (outlines as drawn)
AGND on Top Layer "AGND_L01_P002" (solid, pour order 2): 1182.93,3615.23 1135,3615.23 1135,3295 795,3190 795,2444.73 1182.93,2444.73 1190,2590
VBATT on Top Layer "VBATT_L01_P007" (solid, pour order 7): 1200.51,2600.61 1200.51,2620.24 1235,2650 1235,2730 1280,2780 1280,2905 1475,2905 1475,2835 1475,2640 1475,2445.56 1313.7,2445.56 1220.98,2600.61
P5V on Top Layer "P5V_L01_P008" (solid, pour order 8): 1475,3035 1475,3105 1410,3105 1300,3210 1300,3295 1259.98,3613.4 1208.22,3613.4 1204.04,3335.83 1195.51,3315.19 1235,3268.34 1235,3200 1270,3165 1270,3035
P5V on Top Layer "P5V_L01_P010" (solid, pour order 10): 3256.47,5384.51 3256.76,5344.06 3267.41,5333.41 3267.41,5230.24 3314.68,5182.98 3384.28,5182.98 3384.28,5231.57 3337.78,5278.06 3337.78,5341.46 3294.63,5384.62
AGND on Top Layer "AGND_L01_P012" (solid, pour order 12): 3245.17,5379.59 3244.86,5346.91 3239.6,5341.65 3239.6,4925.42 3149.6,4925.42 3043.79,5031.24 3044.72,5032.17 3044.72,5100.13 3085.09,5100.13 3101.59,5083.64 3194.2,5083.64 3205.38,5094.81 3205.38,5221.56 3173.65,5253.29 3173.65,5334.22 3219.02,5379.59
P5V on Top Layer "P5V_L01_P013" (solid, pour order 13): 3044.37,2157.53 3044.37,2119.92 3101.45,2063.31 3101.45,2015.55 3149.97,1967.03 3172.95,1967.03 3172.95,1998.53 3152.36,2019.11 3152.36,2122.69 3130.46,2151.32 3125.71,2157.53
AGND on Top Layer "AGND_L01_P014" (solid, pour order 14): 3184.52,1971.95 3209.48,1971.95 3209.72,1971.71 3255,2016.99 3255,2096.37 3221.27,2130.11 3221.19,2130.11 3221.19,2260.14 3229.95,2268.9 3230.26,2268.59 3329.43,2268.59 3351.69,2246.32 3392.7,2246.32 3392.7,2320.19 3286.77,2426.13 3184.52,2426.13
P5V on P5V (split plane): 5066.42,6144.61 5074.18,6143.46 5081.8,6141.55 5089.19,6138.91 5096.29,6135.55 5103.02,6131.51 5109.33,6126.84 5114.68,6121.99 5115.08,6121.5 5215.79,6020.79 5716.5,5520.08 5716.99,5519.68 5721.84,5514.33 5726.51,5508.02 5730.55,5501.29 5733.91,5494.19 5736.55,5486.8 5738.46,5479.19 5739.61,5471.42 5739.96,5464.21 5739.9,5463.58 5739.9,5400 5739.9,1880 5739.9,1816.42 5739.96,1815.79 5739.61,1808.58 5738.46,1800.81 5736.55,1793.2 5733.91,1785.81 5730.55,1778.71 5726.51,1771.98 5721.84,1765.67 5716.99,1760.32 5716.5,1759.92 5615.79,1659.21 5225.79,1269.21 5115.08,1158.5 5114.68,1158.01 5109.33,1153.16 5103.02,1148.48 5096.29,1144.45 5089.19,1141.09 5081.8,1138.45 5074.18,1136.54 5066.42,1135.39 5059.21,1135.03 5058.58,1135.1 4995,1135.1 1475,1135.1 1411.42,1135.1 1410.79,1135.03 1403.58,1135.39 1395.81,1136.54 1388.2,1138.45 1380.81,1141.09 1373.71,1144.45 1366.98,1148.49 1360.67,1153.16 1355.32,1158.01 1354.92,1158.5 1249.21,1264.21 859.21,1654.21 753.5,1759.92 753.01,1760.32 748.16,1765.67 743.49,1771.98 739.45,1778.71 736.09,1785.81 733.45,1793.2 731.54,1800.81 730.39,1808.58 730.03,1815.79 730.1,1816.42 730.1,1880 730.1,5400 730.1,5463.58 730.04,5464.21 730.39,5471.42 731.54,5479.19 733.45,5486.8 736.09,5494.19 739.45,5501.29 743.49,5508.02 748.16,5514.33 753.01,5519.68 753.5,5520.08 859.21,5625.79 1249.21,6015.79 1354.92,6121.5 1355.32,6121.99 1360.67,6126.84 1366.98,6131.51 1373.71,6135.55 1380.81,6138.91 1388.2,6141.55 1395.81,6143.46 1403.58,6144.61 1410.79,6144.96 1411.42,6144.9 1475,6144.9 4995,6144.9 5058.58,6144.9 5059.21,6144.97
AGND on AGND (split plane): 5066.42,6144.61 5074.18,6143.46 5081.8,6141.55 5089.19,6138.91 5096.29,6135.55 5103.02,6131.51 5109.33,6126.84 5114.68,6121.99 5115.08,6121.5 5215.79,6020.79 5716.5,5520.08 5716.99,5519.68 5721.84,5514.33 5726.51,5508.02 5730.55,5501.29 5733.91,5494.19 5736.55,5486.8 5738.46,5479.19 5739.61,5471.42 5739.96,5464.21 5739.9,5463.58 5739.9,5400 5739.9,1880 5739.9,1816.42 5739.96,1815.79 5739.61,1808.58 5738.46,1800.81 5736.55,1793.2 5733.91,1785.81 5730.55,1778.71 5726.51,1771.98 5721.84,1765.67 5716.99,1760.32 5716.5,1759.92 5615.79,1659.21 5225.79,1269.21 5115.08,1158.5 5114.68,1158.01 5109.33,1153.16 5103.02,1148.48 5096.29,1144.45 5089.19,1141.09 5081.8,1138.45 5074.18,1136.54 5066.42,1135.39 5059.21,1135.03 5058.58,1135.1 4995,1135.1 1475,1135.1 1411.42,1135.1 1410.79,1135.03 1403.58,1135.39 1395.81,1136.54 1388.2,1138.45 1380.81,1141.09 1373.71,1144.45 1366.98,1148.49 1360.67,1153.16 1355.32,1158.01 1354.92,1158.5 1249.21,1264.21 859.21,1654.21 753.5,1759.92 753.01,1760.32 748.16,1765.67 743.49,1771.98 739.45,1778.71 736.09,1785.81 733.45,1793.2 731.54,1800.81 730.39,1808.58 730.03,1815.79 730.1,1816.42 730.1,1880 730.1,5400 730.1,5463.58 730.04,5464.21 730.39,5471.42 731.54,5479.19 733.45,5486.8 736.09,5494.19 739.45,5501.29 743.49,5508.02 748.16,5514.33 753.01,5519.68 753.5,5520.08 859.21,5625.79 1249.21,6015.79 1354.92,6121.5 1355.32,6121.99 1360.67,6126.84 1366.98,6131.51 1373.71,6135.55 1380.81,6138.91 1388.2,6141.55 1395.81,6143.46 1403.58,6144.61 1410.79,6144.96 1411.42,6144.9 1475,6144.9 4995,6144.9 5058.58,6144.9 5059.21,6144.97
3V3P on 3V3P (split plane): 5066.42,6144.61 5074.18,6143.46 5081.8,6141.55 5089.19,6138.91 5096.29,6135.55 5103.02,6131.51 5109.33,6126.84 5114.68,6121.99 5115.08,6121.5 5215.79,6020.79 5716.5,5520.08 5716.99,5519.68 5721.84,5514.33 5726.51,5508.02 5730.55,5501.29 5733.91,5494.19 5736.55,5486.8 5738.46,5479.19 5739.61,5471.42 5739.96,5464.21 5739.9,5463.58 5739.9,5400 5739.9,1880 5739.9,1816.42 5739.96,1815.79 5739.61,1808.58 5738.46,1800.81 5736.55,1793.2 5733.91,1785.81 5730.55,1778.71 5726.51,1771.98 5721.84,1765.67 5716.99,1760.32 5716.5,1759.92 5615.79,1659.21 5225.79,1269.21 5115.08,1158.5 5114.68,1158.01 5109.33,1153.16 5103.02,1148.48 5096.29,1144.45 5089.19,1141.09 5081.8,1138.45 5074.18,1136.54 5066.42,1135.39 5059.21,1135.03 5058.58,1135.1 4995,1135.1 1475,1135.1 1411.42,1135.1 1410.79,1135.03 1403.58,1135.39 1395.81,1136.54 1388.2,1138.45 1380.81,1141.09 1373.71,1144.45 1366.98,1148.49 1360.67,1153.16 1355.32,1158.01 1354.92,1158.5 1249.21,1264.21 859.21,1654.21 753.5,1759.92 753.01,1760.32 748.16,1765.67 743.49,1771.98 739.45,1778.71 736.09,1785.81 733.45,1793.2 731.54,1800.81 730.39,1808.58 730.03,1815.79 730.1,1816.42 730.1,1880 730.1,5400 730.1,5463.58 730.04,5464.21 730.39,5471.42 731.54,5479.19 733.45,5486.8 736.09,5494.19 739.45,5501.29 743.49,5508.02 748.16,5514.33 753.01,5519.68 753.5,5520.08 859.21,5625.79 1249.21,6015.79 1354.92,6121.5 1355.32,6121.99 1360.67,6126.84 1366.98,6131.51 1373.71,6135.55 1380.81,6138.91 1388.2,6141.55 1395.81,6143.46 1403.58,6144.61 1410.79,6144.96 1411.42,6144.9 1475,6144.9 4995,6144.9 5058.58,6144.9 5059.21,6144.97
VBATT on VBATT (split plane): 5066.42,6144.61 5074.18,6143.46 5081.8,6141.55 5089.19,6138.91 5096.29,6135.55 5103.02,6131.51 5109.33,6126.84 5114.68,6121.99 5115.08,6121.5 5215.79,6020.79 5716.5,5520.08 5716.99,5519.68 5721.84,5514.33 5726.51,5508.02 5730.55,5501.29 5733.91,5494.19 5736.55,5486.8 5738.46,5479.19 5739.61,5471.42 5739.96,5464.21 5739.9,5463.58 5739.9,5400 5739.9,1880 5739.9,1816.42 5739.96,1815.79 5739.61,1808.58 5738.46,1800.81 5736.55,1793.2 5733.91,1785.81 5730.55,1778.71 5726.51,1771.98 5721.84,1765.67 5716.99,1760.32 5716.5,1759.92 5615.79,1659.21 5225.79,1269.21 5115.08,1158.5 5114.68,1158.01 5109.33,1153.16 5103.02,1148.48 5096.29,1144.45 5089.19,1141.09 5081.8,1138.45 5074.18,1136.54 5066.42,1135.39 5059.21,1135.03 5058.58,1135.1 4995,1135.1 1475,1135.1 1411.42,1135.1 1410.79,1135.03 1403.58,1135.39 1395.81,1136.54 1388.2,1138.45 1380.81,1141.09 1373.71,1144.45 1366.98,1148.49 1360.67,1153.16 1355.32,1158.01 1354.92,1158.5 1249.21,1264.21 859.21,1654.21 753.5,1759.92 753.01,1760.32 748.16,1765.67 743.49,1771.98 739.45,1778.71 736.09,1785.81 733.45,1793.2 731.54,1800.81 730.39,1808.58 730.03,1815.79 730.1,1816.42 730.1,1880 730.1,5400 730.1,5463.58 730.04,5464.21 730.39,5471.42 731.54,5479.19 733.45,5486.8 736.09,5494.19 739.45,5501.29 743.49,5508.02 748.16,5514.33 753.01,5519.68 753.5,5520.08 859.21,5625.79 1249.21,6015.79 1354.92,6121.5 1355.32,6121.99 1360.67,6126.84 1366.98,6131.51 1373.71,6135.55 1380.81,6138.91 1388.2,6141.55 1395.81,6143.46 1403.58,6144.61 1410.79,6144.96 1411.42,6144.9 1475,6144.9 4995,6144.9 5058.58,6144.9 5059.21,6144.97